# Altium PCB DB.PcbDoc (part 1 of 2)
Units mil, origin at the board's own origin, x right, y up, seen from the top; angles counter-clockwise.
Board outline 2968 x 1917 mil, 2 copper layers (Top Layer, Bottom Layer); 91 components, 77 nets, 333 pads, 79 vias.
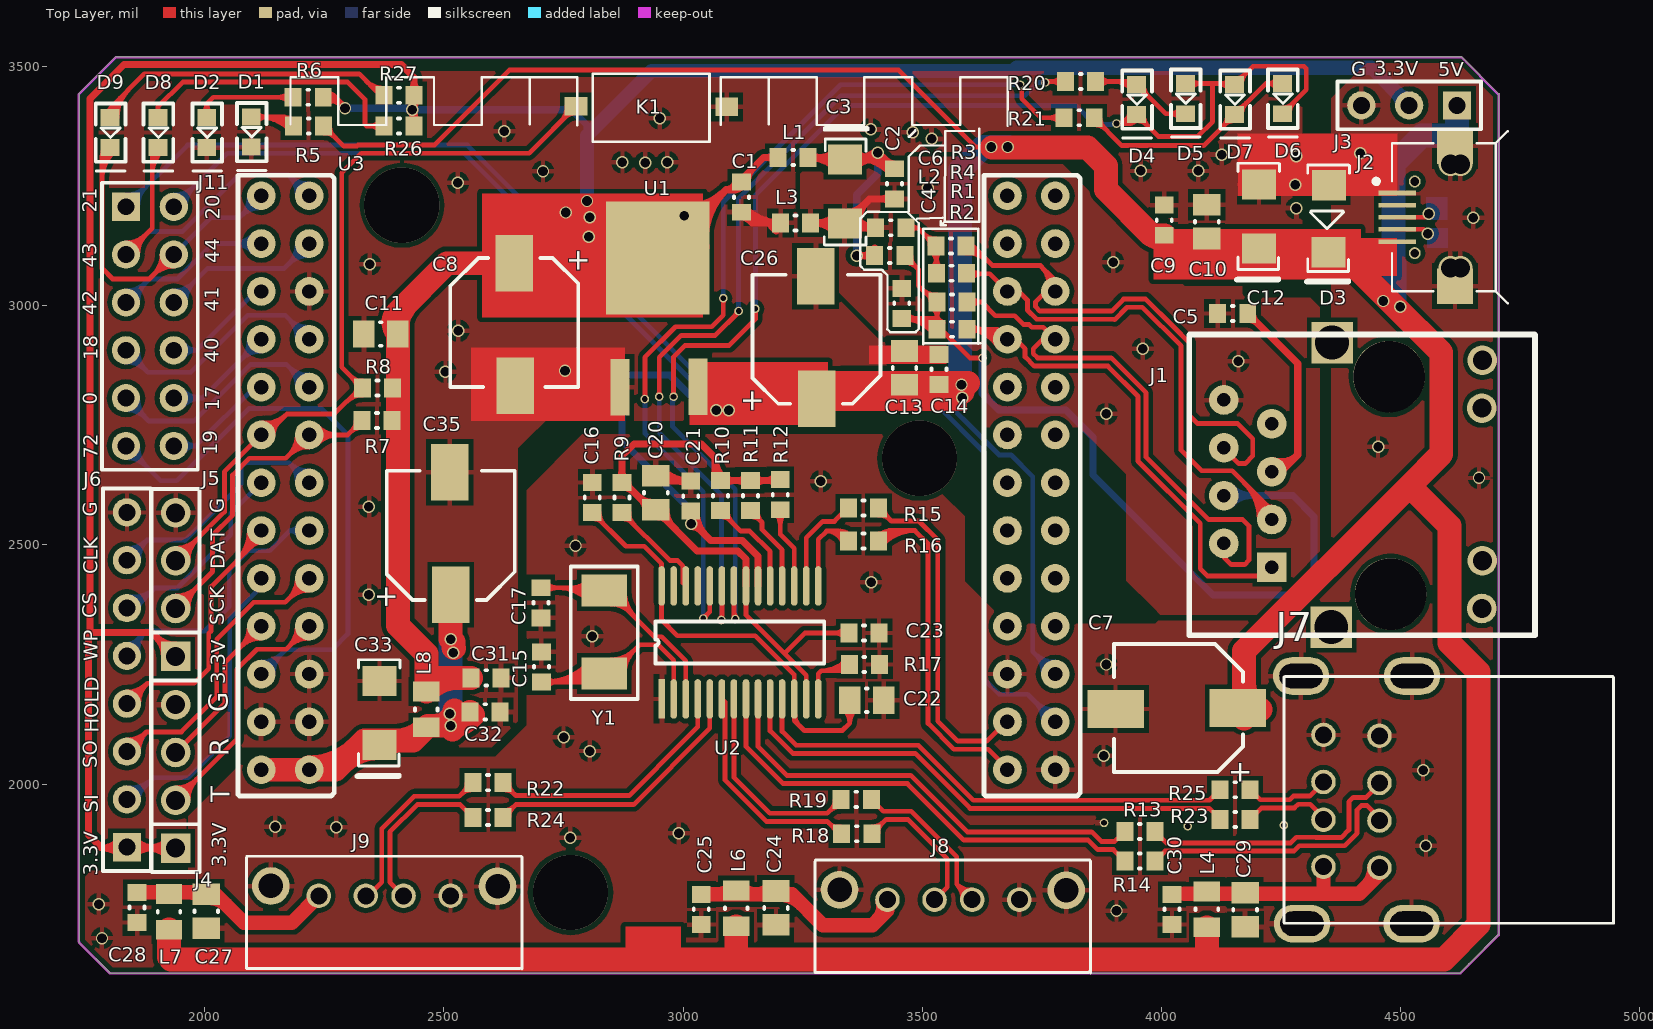
[diagram p0: Top Layer view]
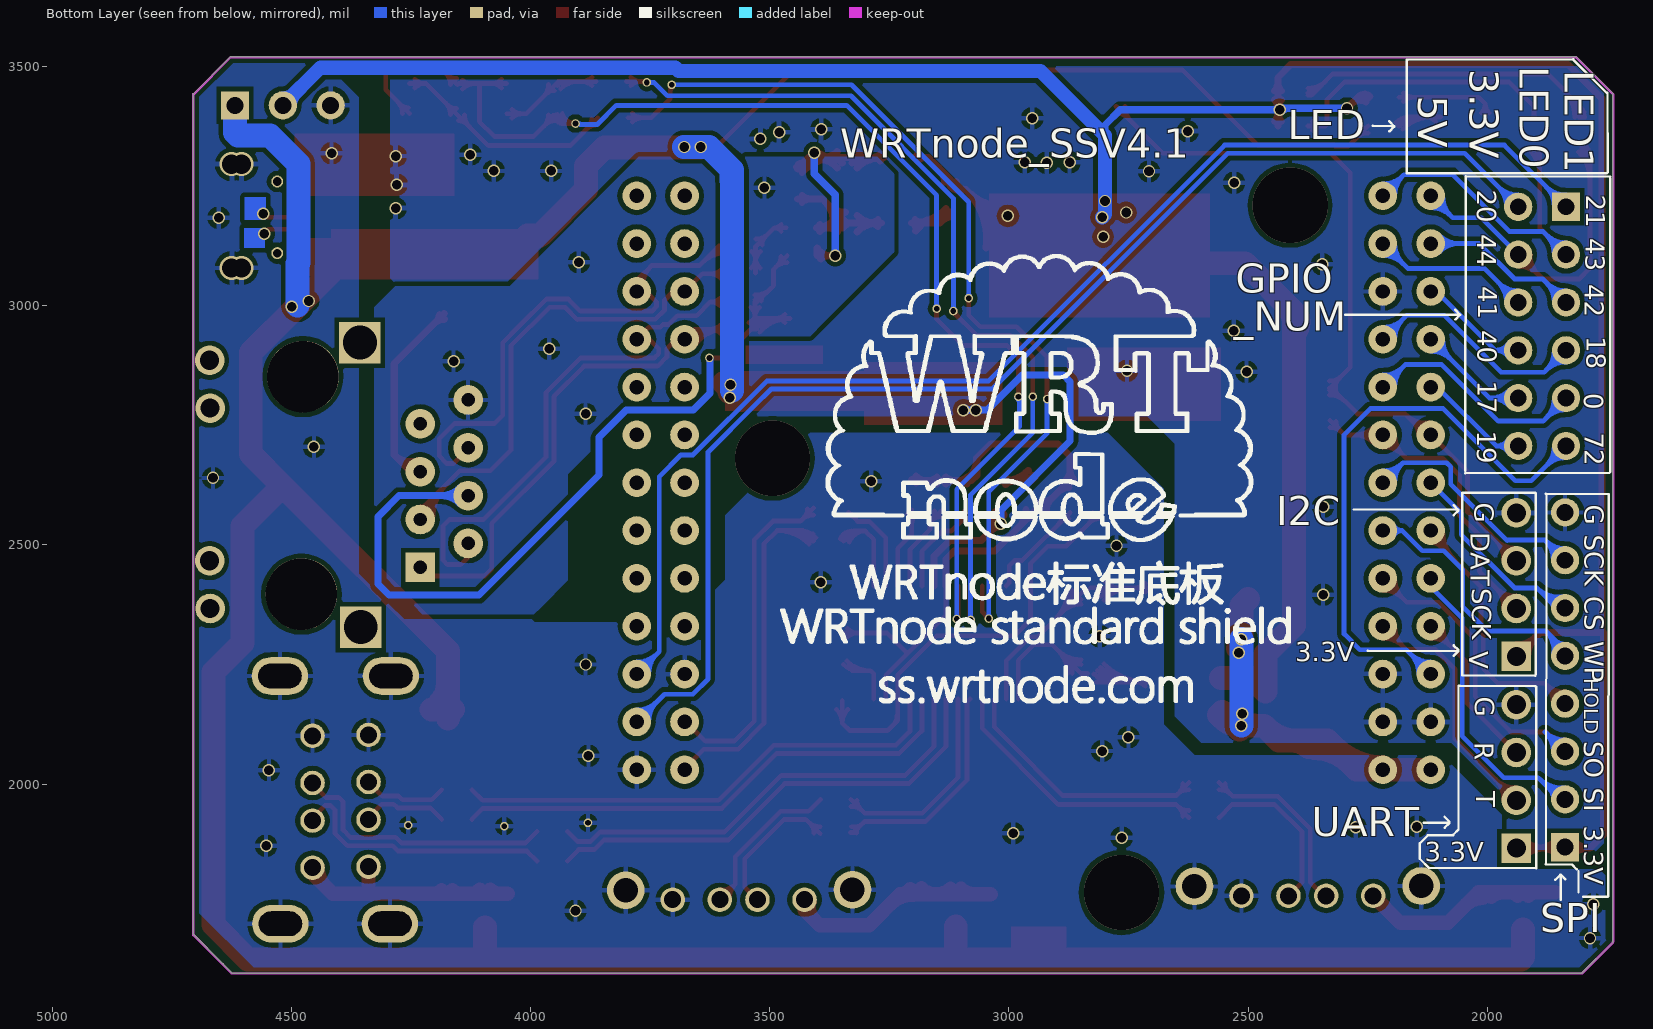
[diagram p1: Bottom Layer view, seen from below]

## Layer stack, top to bottom
Top Layer: signal copper 1.4
Dielectric: dielectric 12.6, FR-4, Dk 4.8
Bottom Layer: signal copper 1.4

## Board outline
1737,3444 1737,1669 1802,1604 4623,1604 4643,1624 4705,1686 4705,1688 4705,3443 4627,3521 1814,3521 1737,3444

## Design rules (kind name [scope] priority, off if disabled: settings)
Clearance [All] p1: gap=10
PolygonConnect [All] p1: connectstyle=Relief reliefconductorwidth=10 reliefentries=4 polygonreliefangle="90 Angle"
RoutingVias [All] p1: holewidth=20 width=30 viastyle="Through Hole" minholewidth=10 minwidth=10 maxholewidth=30 maxwidth=50
SilkToSilkClearance [All] p1: silktosilkclearance=0
SilkscreenOverComponentPads [All] p1: minsilkscreentomaskgap=0
SolderMaskExpansion [All] p1: expansion=4
Width [All] p1: maxlimit=100 minlimit=2 preferedwidth=10
26 further rules are at their usual default settings.

## Classes and differential pairs
component class "U_internet access": C1 C2 C3 C4 C5 C6 J1 L1 L2 L3 R1 R2 R3 R4
component class U_powre: C7 C8 C9 C10 C11 C34 D1 D2 D3 J2 J3 R5 R6 U1
component class U_spi_iic_uart: J4 J5 J6 R7 R8
component class "U_USB HUB": C12 C13 C14 C15 C16 C17 C18 C19 C20 C21 C22 C23 C24 C25 C26 C27 C28 C29 C30 D4 D5 D6 D7 J7 J8 J9 J10 L4 L5 L6 L7 R9 R10 R11 R12 R13 R14 R15 R16 R17 R18 R19 R20 R21 R22 R23 R24 R25 U2 Y1
component class U_WRTnode: C31 C32 C33 C34 C35 D8 D9 J11 K1 L8 R26 R27 U3

## Components (designator, comment, footprint, x,y, rotation, side; value= is the part's Value field where it differs from the comment)
C1 "C0603" C0603N 3118,3228 r270 top
C2 "C0603" C0603N 3438,3256 r270 top
C3 "C1206-A--AVX" C1206-A 3338,3274 r270 top
C4 "C0603" C0603N 3461,3004 r90 top
C5 "C0603" C0603N 4148,2980 r0 top
C6 "C0603" C0603N 3433,3159 r0 top
C7 "Cap Pol1" 16V220U 4042,2151 r270 top
C8 "Cap Pol1" 16V220U 2655,2971 r0 top
C9 "C0603N" C0603N 4002,3180 r270 top
C10 "C0805N" C0805N 4090,3174 r270 top
C11 "C0805" C0805N 2370,2936 r0 top
C12 "C1206-A--AVX" C1206-A 4204,3151 r90 top
C13 "C0805" C0805N 3458,2868 r270 top
C14 "C0603" C0603N 3531,2868 r270 top
C15 "C0603" C0603N 2708,2244 r90 top
C16 "C0603" C0603N 2806,2600 r270 top
C17 "C0603" C0603N 2699,2380 r270 top
C20 "C0805" C0805N 2938,2607 r270 top
C21 "C0603" C0603N 3012,2603 r270 top
C22 "C0805" C0805N 3386,2170 r0 top
C23 "C0603" C0603N 3377,2312 r0 top
C24 "C0805" C0805N 3199,1743 r90 top
C25 "C0603" C0603N 3042,1737 r90 top
C26 "Cap Pol1" 16V220U 3271,2924 r180 top
C27 "C0805" C0805N 2008,1736 r90 top
C28 "C0603" C0603N 1862,1741 r90 top
C29 "C0805" C0805N 4180,1739 r90 top
C30 "C0603" C0603N 4026,1737 r90 top
C31 "C0603N" C0603N 2587,2218 r0 top
C32 "C0603N" C0603N 2585,2147 r0 top
C33 "C1206-A--AVX" C1206-A 2365,2113 r90 top
C35 "Cap Pol1" 16V220U 2506,2514 r180 top
D1 "LED0603" LED0603 2098,3363 r270 top
D2 "LED0603" LED0603 2005,3362 r270 top
D3 "4733/05w" ZMM5V1 4345,3183 r90 top
D4 "LED0603" LED0603 3949,3431 r270 top
D5 "LED0603" LED0603 4051,3433 r270 top
D6 "LED0603" LED0603 4254,3433 r270 top
D7 "LED0603" LED0603 4154,3431 r270 top
D8 "LED1" LED0603 1903,3362 r270 top
D9 "LED1" LED0603 1803,3362 r270 top
J1 "RJ-45-RH911105A" RJ-45-HR911105A 4449,2630 r270 top
J2 "USB_MICRO" "MICRO USB2" 4697,3187 r0 top
J3 "Header 3" HDR1X3 4618,3419 r180 top
J4 "SIP4" SIP4-2.54 1941,1867 r90 top
J5 "SIP4" SIP4-2.54 1941,2268 r90 top
J6 "Header 8" HDR1X8 1837,1868 r90 top
J7 "USB-DOUBLE" PCBCOMPONENT_1 4388,1973 r0 top
J8 "USB_SOCKET" USB-A-90-L 3477,1632 r0 top
J9 "USB_SOCKET" USB-A-90-L 2288,1640 r0 top
J11 "Header 6X2" HDR2X6 1835,3207 r270 top
K1 "Header 2" 3*6key 2940,3420 r180 top
L1 "L0603" C0603N 3229,3306 r0 top
L2 "L0603" C0603N 3433,3109 r180 top
L3 "L0603" C0603N 3234,3169 r0 top
L4 "R0805N" R0805N 4091,1742 r90 top
L6 "R0805N" R0805N 3107,1744 r90 top
L7 "R0805N" R0805N 1921,1737 r90 top
L8 "R0805N" R0805N 2467,2152 r270 top
R1 "R0603" R0603N 3561,3005 r180 top
R2 "R0603" R0603N 3561,2948 r180 top
R3 "R0603" R0603N 3561,3128 r0 top
R4 "R0603" R0603N 3562,3071 r0 top
R5 "R0603" R0603N 2216,3373 r180 top
R6 "R0603" R0603N 2215,3433 r180 top
R7 "R0603" R0603N 2361,2763 r0 top
R8 "R0603" R0603N 2360,2825 r180 top
R9 "R0603" R0603N 2869,2600 r90 top
R10 "Res Semi" R0603N 3075,2604 r90 top
R11 "Res Semi" R0603N 3138,2604 r90 top
R12 "Res Semi" R0603N 3200,2606 r90 top
R13 "Res Semi" R0603N 3956,1904 r0 top
R14 "Res Semi" R0603N 3956,1842 r0 top
R15 "R0603" R0603N 3378,2580 r0 top
R16 "R0603" R0603N 3378,2511 r0 top
R17 "R0603" R0603N 3378,2247 r180 top
R18 "Res Semi" R0603N 3364,1899 r0 top
R19 "Res Semi" R0603N 3363,1971 r0 top
R20 "R0603" R0603N 3830,3466 r180 top
R21 "R0603" R0603N 3827,3390 r180 top
R22 "Res Semi" R0603N 2591,2000 r180 top
R23 "R0603N" R0603N 4155,1929 r0 top
R24 "Res Semi" R0603N 2591,1927 r180 top
R25 "R0603N" R0603N 4155,1991 r0 top
R26 "R0603" R0603N 2405,3373 r180 top
R27 "R0603" R0603N 2405,3437 r180 top
U1 "LD1117-3.3" LD1117-3.3V 2951,2963 r0 top
U2 "FE1.1S" SSOP28 2955,2178 r90 top
U3 "WRTnode_MainBoard" WRTNODE_MAINBOARD_DIP26*2 3778,3230 r0 top locked
Y1 "12MHz" XTAL_5032_2 2835,2318 r270 top
? "Comment" LOGO 2938,2649.43 r180 bottom

## Footprints (in the part's own frame and the unit in brackets; to place one, negate y for a bottom-side part, rotate by r counter-clockwise, add the part's x,y. Pads: shape width x height; smd on the part's side, far side on the other; paste and mask are expansions set on the pad)
3*6key [mil]
  rect 47.24x39.37 smd: 1(-151,4) 2(164,3)
  silkscreen extent -115,-65 129,77, body extent -113,-50 128,66, height 50
16V220U [mil]
  rect 78.74x118.11 smd: 1(-8,118) 2(-6,-138)
  silkscreen extent -142,-141 126,129, body extent -125,-133 114,107, height 150
C0603N [mm]
  rect 0.9x1 smd: 1(-0.775,0.102) 2(0.825,0.102)
  silkscreen extent -0.02,-0.3 0.08,0.5, body extent -0.85,-0.37 0.9,0.58, height 0.55
C0805N [mm]
  rect 1.15x1.45 smd: 1(-0.951,0.127) 2(0.849,0.127)
  silkscreen extent -0.1,-0.5 0,0.75, body extent -1.15,-0.6 1.05,0.85, height 0.75
C1206-A [mm]
  rect 1.6x1.8 smd: 1(-0.8,0) 2(2.6,0)
  silkscreen extent -2.51,-1.09 3.73,1.24, body extent -1.22,-0.89 2.98,0.91, height 0.75
HDR1X3 [mm] "Connector; Header; 3 Position"
  rect 1.5x1.5 hole 0.9: 1(0,0)
  round 1.5 hole 0.9: 2(2.54,0) 3(5.08,0)
  silkscreen extent -1.27,-1.27 6.35,1.27
HDR1X8 [mm] "Connector; Header; 8 Position"
  rect 1.5x1.5 hole 0.9: 1(0,0)
  round 1.5 hole 0.9: 2(2.54,0) 3(5.08,0) 4(7.62,0) 5(10.16,0) 6(12.7,0) 7(15.24,0) 8(17.78,0)
  silkscreen extent -1.27,-1.27 19.05,1.27
HDR2X6 [mm] "Connector; Header; 6x2 Position"
  rect 1.5x1.5 hole 0.9: 1(0,0)
  round 1.5 hole 0.9: 2(0,2.54) 3(2.54,0) 4(2.54,2.54) 5(5.08,0) 6(5.08,2.54) 7(7.62,0) 8(7.62,2.54) 9(10.16,0) 10(10.16,2.54) 11(12.7,0) 12(12.7,2.54)
  silkscreen extent -1.27,-1.27 13.97,3.81
LD1117-3.3V [mil]
  rect 39.37x118.11 smd: 1(80,-132) 2(-83,-133)
  rect 216.54x236.22 smd: 3(-4,137)
  body extent -115,-79 110,222, height 94
LED0603 [mm]
  rect 0.9x1 smd: 1(-0.8,-0.025) 2(0.8,-0.025)
  silkscreen extent -1.55,-0.79 2.03,0.79, body extent -0.87,-0.5 0.88,0.45, height 1.1
LOGO [mil]
  silkscreen extent -537,-478 525,456
"MICRO USB2" [mil]
  rect 78.74x9.84 smd: 1(-204,49) 2(-204,23) 3(-204,-2) 4(-204,-27) 5(-204,-53)
  round 25 hole 18 unplated: MH1(-167.4,72.83) MH2(-167.4,-76.77)
  rect 74.8x74.8 smd: ""(-83,-146) ""(-83,147)
  silkscreen extent -253,-182 27,178, body extent -204,-163 29,159, height 105
PCBCOMPONENT_1 [mm]
  round 1.3 hole 0.9: 1(-1.25,3.297) 2(-1.25,0.797) 3(-1.25,-1.203) 4(-1.25,-3.703) 5(1.722,-3.754) 6(1.722,-1.254) 7(1.722,0.746) 8(1.722,3.246)
  oval 3x2 hole 1.3 slot 2.3 at 0 deg: 9(-2.388,-6.731) 10(3.429,-6.731) 11(3.454,6.426) 12(-2.438,6.426)
  silkscreen extent -3.35,-6.71 14.15,6.4, body extent -3.4,-6.81 14.15,6.43, height 15.6
R0603N [mm]
  rect 0.9x1 smd: 1(-0.825,-0.076) 2(0.775,-0.076)
  silkscreen extent -0.08,-0.48 0.02,0.32, body extent -0.87,-0.55 0.82,0.4, height 0.6
R0805N [mm]
  rect 1.05x1.4 smd: 1(-1.052,-0.102) 2(0.848,-0.102)
  silkscreen extent -0.15,-0.7 -0.05,0.5, body extent -1.2,-0.78 1,0.57, height 0.7
RJ-45-HR911105A [mil]
  rect 86.61x86.61 hole 70.87: 0(-293,-92) 0(302,-94)
  round 149.61 hole 149.61: 0(-222,27) 0(233,30)
  rect 62x62 hole 28: 1(176.89,-218.37)
  round 62 hole 28: 2(126.89,-318.37) 3(76.89,-218.37) 4(26.89,-318.37) 5(-23.11,-218.37) 6(-73.11,-318.37) 7(-123.11,-218.37) 8(-173.11,-318.37)
  round 62 hole 40: 9(263,221) 10(163,222) 11(-156,221) 12(-256,222)
  silkscreen extent -310,-391 319,332, body extent -302,-387 304,349, height 550
SIP4-2.54 [mil]
  rect 62x62 hole 40: 1(-1,2)
  round 62 hole 40: 2(99,2) 3(199,2) 4(299,2)
  silkscreen extent -51,-48 349,52, body extent -70,-44 330,56, height 131
SSOP28 [mm]
  rect 2.1x0.35 smd: 1(0,0)
  oval 2.1x0.35 smd: 2(0,-0.64) 3(0,-1.28) 4(0,-1.92) 5(0,-2.56) 6(0,-3.2) 7(0,-3.84) 8(0,-4.48) 9(0,-5.12) 10(0,-5.76) 11(0,-6.4) 12(0,-7.04) 13(0,-7.68) 14(0,-8.32) 15(6,-8.32) 16(6,-7.68) 17(6,-7.04) 18(6,-6.4) 19(6,-5.76) 20(6,-5.12) 21(6,-4.48) 22(6,-3.84) 23(6,-3.2) 24(6,-2.56) 25(6,-1.92) 26(6,-1.28) 27(6,-0.64) 28(6,0)
  silkscreen extent 1.89,-8.64 4.12,0.32, body extent 0.89,-8.76 5.08,0.38, height 0.76
USB-A-90-L [mm]
  round 1.3 hole 0.9: 1(-1.265,3.206) 2(1.235,3.206) 3(3.235,3.206) 4(5.735,3.206)
  round 2 hole 1.3: 5(-3.81,3.734) 6(8.23,3.708)
  silkscreen extent -5.11,-0.69 9.53,5.31, body extent -5.32,-1.19 9.74,5.81, height 14.5
WRTNODE_MAINBOARD_DIP26*2 [mil]
  round 60 hole 30: 1(0,0) 2(0,-100) 3(0,-200) 4(0,-300) 5(0,-400) 6(0,-500) 7(0,-600) 8(0,-700) 9(0,-800) 10(0,-900) 11(0,-1000) 12(0,-1100) 13(0,-1200) 14(-100,0) 15(-100,-100) 16(-100,-200) 17(-100,-300) 18(-100,-400) 19(-100,-500) 20(-100,-600) 21(-100,-700) 22(-100,-800) 23(-100,-900) 24(-100,-1000) 25(-100,-1100) 26(-100,-1200) 27(-1560,0) 28(-1560,-100) 29(-1560,-200) 30(-1560,-300) 31(-1560,-400) 32(-1560,-500) 33(-1560,-600) 34(-1560,-700) 35(-1560,-800) 36(-1560,-900) 37(-1560,-1000) 38(-1560,-1100) 39(-1560,-1200) 40(-1660,0) 41(-1660,-100) 42(-1660,-200) 43(-1660,-300) 44(-1660,-400) 45(-1660,-500) 46(-1660,-600) 47(-1660,-700) 48(-1660,-800) 49(-1660,-900) 50(-1660,-1000) 51(-1660,-1100) 52(-1660,-1200)
  silkscreen extent -1709,-1255 52,248, body extent -1712,-1263 47,50, height 335
XTAL_5032_2 [mm]
  rect 1.7x2.4 smd: 1(-2.2,0) 2(2.2,0)
  silkscreen extent -3.48,-1.78 3.56,1.78, body extent -2.5,-1.48 2.5,1.52, height 1.5
ZMM5V1 [mil]
  rect 62.99x70.87 smd: 1(69,-5) 2(-71,-4)
  silkscreen extent -135,-48 111,44, body extent -84,-40 81,31, height 30

## Part data
C1 C2 C4 C5 C6 C9 C10 C11 C13 C14 C15 C16 C17 C20 C21 C22 C23 C24 C25 C27 C28 C29 C30: library part "Cap Semi", "Capacitor (Semiconductor SIM Model)"
C3 C12 C33: library part "Cap Pol3", "Polarized Capacitor (Surface Mount)"
C7 C8 C26 C35: "Polarized Capacitor (Radial)"
C31 C32: library part Cap, "Capacitor"
D1 D2 D4 D5 D6 D7: library part LED, "LED"
D3: library part Diode, "Default Diode"
D8 D9: "Typical RED GaAs LED"
J2: library part USB_powre
J3: "Header, 3-Pin"
J4 J5: "jointbar"
J6: "Header, 8-Pin"
J8 J9: "USB_TYPEA_SOCKET"
J11: "Header, 6-Pin, Dual row"
K1: "Header, 2-Pin"
L1 L2 L3 L4 L6 L7 L8: library part Inductor, "Inductor"
R1 R2 R3 R4 R5 R6 R7 R8 R9 R15 R16 R17 R20 R21 R23 R25 R26 R27: library part "Res Semi", "Semiconductor Resistor"
R10 R11 R12 R13 R14 R18 R19 R22 R24: "Semiconductor Resistor"
Y1: library part XTAL, "Crystal Oscillator"

## Free pads (board coordinates)
  round 18 hole 12: 0(3626,2891) 1(3042,2346) 2(3080,2343) 2(3880,1919) 3(3109,2345) 3(4055,1912) 4(2920,2805) 5(2950,2810) 6(2980,2810) 7(3084,3016) 8(3116,2989) 9(3151,2994) 10(3757,3467) 11(3705,3462) 12(3906,3381) 14(4256,1914)

## Via types
v1: diameter 26, hole 20, Top Layer to Bottom Layer, tented both sides, 72 vias
v2: diameter 50, hole 40, Top Layer to Bottom Layer, 4 vias
v3: diameter 157.48, hole 157.48, Top Layer to Bottom Layer, 3 vias

## Nets (pads, with @x,y where several pads share a name; then routed paths per layer and width w, separated by ;. In a path a pad name is that pad's centre, name@x,y a point inside that pad or via, vN(x,y) a via of type N, cw(c..) or ccw(c..) an arc to the next point about the centre after c; other vN are vias at no path point)
ANT_TRN: J11.12 U3.44 | length 294.4
  Bottom Layer w10: J11.12@1935,2707 1981,2707 ; J11.12@1955.37,2693.33 cw(c1981,2676.13) 1981,2707 ; J11.12@1955.37,2720.67 ccw(c1981,2737.87) 1981,2707 ; U3.44@2118,2830 2104,2830 1981,2707
ANT_TRNB: J11.7 U3.30 | length 771.9
  Bottom Layer w10: J11.7@1835,2882.47 cw(c1835,2823.26) 1876.87,2865.13 cw(c1918.74,2907) J11.7@1859.53,2907 ; J11.7@1835,2892.47 cw(c1835,2857.4) 1859.8,2882.2 cw(c1884.6,2907) J11.7@1849.53,2907 ; J11.7@1835,2907 1881,2861 1971,2861 2090,2980 2168,2980 U3.30@2218,2930 ; U3.30@2193,2930 ccw(c2132.64,2930) 2175.32,2972.68 ccw(c2218,3015.36) U3.30@2218,2955 ; U3.30@2203,2930 ccw(c2166.79,2930) 2192.39,2955.61 ccw(c2218,2981.21) U3.30@2218,2945
AVCC3V3: C2.1 C3.1 L1.2 L2.2 | length 1082.2
  Top Layer w15: L1.2@3261.5,3310 3418.5,3310 C2.1@3442,3286.5 ; L1.2@3265.26,3310 cw(c3265.26,3236.69) C3.1@3317.1,3288.53 ; L1.2@3268.72,3302.78 cw(c3286.16,3285.34) 3286.16,3310 cw(c3286.16,3334.66) L1.2@3268.72,3317.22 ; 3287.01,3310 ccw(c3287.01,3352.55) C3.1@3317.1,3322.46 ; 3301.47,3310 cw(c3301.47,3272.9) C3.1@3327.7,3299.13 ; C3.1@3348.3,3299.13 cw(c3374.53,3272.9) 3374.53,3310 ; C3.1@3358.62,3310 cw(c3358.62,3205.09) C2.1@3432.81,3279.27 ; C3.1@3358.9,3288.53 cw(c3410.74,3236.69) v1@3410.74,3310 ; C3.1@3358.9,3322.46 ccw(c3388.99,3352.55) 3388.99,3310 ; v1(3363,3105) L2.2@3400.5,3105 L2.2@3400.5,3120.32 ; v1@3366.89,3101.11 cw(c3376.28,3091.72) 3376.28,3105 cw(c3376.28,3118.28) v1@3366.89,3108.89 ; C3.1@3369.58,3310 ccw(c3369.58,3357.42) v1@3403.11,3323.89 ; L2.2@3393.28,3097.78 ccw(c3375.84,3080.34) 3375.84,3105 ccw(c3375.84,3129.66) L2.2@3393.28,3112.22 ; 3394.84,3310 cw(c3394.84,3241.3) C2.1@3443.41,3289.88 ; v1@3407,3314.5 cw(c3407,3297.61) 3418.94,3309.55 ; 3421.2,3307.3 cw(c3400.4,3286.5) C2.1@3429.82,3286.5 ; C2.1@3425.95,3302.54 ccw(c3440.03,3316.62) C2.1@3440.03,3296.71
  Bottom Layer w15: v1@3359.11,3108.89 ccw(c3349.72,3118.28) 3363,3118.28 ccw(c3376.28,3118.28) v1@3366.89,3108.89 ; v1(3363,3105) 3363,3232 3407,3276 v1(3407,3320) ; v1@3403.11,3316.11 cw(c3393.72,3306.72) 3407,3306.72 cw(c3420.28,3306.72) v1@3410.89,3316.11
DRV: D4.2 D5.1 D6.2 D7.1 pad.3@3109,2345 pad.6 pad.9 pad.12 U2.22 | length 3173
  Top Layer w10: pad.6@2977.17,2812.83 ccw(c2970.34,2819.66) 2980,2819.66 ccw(c2989.66,2819.66) pad.6@2982.83,2812.83 ; pad.6@2980,2810 2980,2893 3004,2917 3096,2917 3151,2972 pad.9@3151,2994 ; 3106.18,2361.46 ccw(c3125.46,2361.46) pad.3@3111.83,2347.83 ; U2.22@3106.18,2414.22 3106.18,2347.82 pad.3@3109,2345 ; pad.9@3148.17,2991.17 cw(c3141.34,2984.34) 3151,2984.34 cw(c3160.66,2984.34) pad.9@3153.83,2991.17 ; pad.12@3908.83,3378.17 cw(c3915.66,3371.34) 3915.66,3381 cw(c3915.66,3390.66) pad.12@3908.83,3383.83 ; 3918.82,3381 ccw(c3918.82,3406.34) D4.2@3943.4,3400.17 ; 3931.64,3381 ccw(c3931.64,3403.12) D4.2@3953.1,3397.73 ; D4.2@3933.7,3402.6 cw(c3906,3409.56) pad.12@3906,3381 3929.5,3381 D4.2@3948,3399.5 3993.5,3354 4076,3354 4107,3385 4107,3463.5 4108,3464.5 ; D4.2@3933.88,3395.74 cw(c3920.78,3391.68) 3930.48,3381.98 cw(c3942.56,3369.9) D4.2@3944.55,3386.87 ; D4.2@3949.97,3386.79 cw(c3949.97,3360.84) 3968.32,3379.19 ; D4.2@3962.69,3399.5 ccw(c3998.14,3399.5) 3973.07,3374.44 ; D5.1@4050,3464.5 4108,3464.5 ; D5.1@4060.96,3455.5 cw(c4082.67,3433.8) 4082.67,3464.5 cw(c4082.67,3495.2) D5.1@4060.96,3473.49 ; 4115.5,3464.5 cw(c4115.5,3426.97) D7.1@4142.04,3453.5 ; 4125.16,3464.5 ccw(c4125.16,3488.37) D7.1@4142.04,3471.49 ; D7.1@4154.97,3475.21 ccw(c4154.97,3501.16) 4173.32,3482.81 ; D7.1@4167.69,3462.5 cw(c4203.14,3462.5) 4178.07,3487.56 ; D6.2@4253,3401.5 4303,3451.5 4303,3496 4298,3501 4191.5,3501 D7.1@4153,3462.5 4151,3464.5 4108,3464.5 ; D6.2@4254.97,3414.22 ccw(c4254.97,3440.17) 4273.32,3421.82 ; D6.2@4267.69,3401.5 cw(c4303.14,3401.5) 4278.07,3426.57
  Bottom Layer w10: 2978,2795.51 cw(c2994.49,2795.51) pad.6@2982.83,2807.17 ; pad.6@2980,2810 2978,2808 2978,2747 3109,2616 pad.3@3109,2345 ; pad.3@3106.17,2347.83 ccw(c3099.34,2354.66) 3109,2354.66 ccw(c3118.66,2354.66) pad.3@3111.83,2347.83 ; pad.9@3148.17,2996.83 ccw(c3141.34,3003.66) 3151,3003.66 ccw(c3160.66,3003.66) pad.9@3153.83,2996.83 ; pad.9@3151,2994 3151,3231 3339,3419 3821,3419 3861,3379 3897,3379 ; 3891.51,3379 ccw(c3891.51,3395.49) pad.12@3903.17,3383.83
GND: C1.2 C7.2 C8.2 C9.1 C10.1 C11.1 C12.2 C13.1 C14.1 C15.2 C16.1 C17.2 C20.1 C21.1 C22.2 C23.2 C24.1 C25.1 C26.2 C27.1 C28.1 C29.1 C30.1 C31.2 C32.2 C33.2 C35.2 D1.2 D2.2 D3.1 J2. J2.1 J3.3 J4.4 J5.4 J6.8 J7.1 J7.8 J7.9 J7.10 J7.11 J7.12 J8.4 J8.5 J8.6 J9.4 J9.5 J9.6 K1.1 L3.1 pad.2@3880,1919 pad.3@4055,1912 pad.14 R17.1 U1.2 U2.1 U3.13 U3.24 U3.29 U3.37 U3.38 U3.51 | length 535
  Top Layer w15: C20.1@2943,2644.43 2953.94,2633.5 C21.1@3016,2633.5 ; C20.1@2949,2644.53 ccw(c2975.64,2671.17) 2975.64,2633.5 ; C20.1@2959.61,2655.14 ccw(c3011.86,2707.38) C21.1@3011.86,2633.5 ; C21.1@3006.81,2626.27 ccw(c2989.37,2608.83) 2989.37,2633.5 ccw(c2989.37,2658.16) C21.1@3006.81,2640.72 ; C1.2@3120.59,3192.12 ccw(c3166.75,3238.28) 3166.75,3173 ; C1.2@3122,3195.5 3144.5,3173 L3.1@3203.5,3173 ; C1.2@3123.97,3185.29 cw(c3123.97,3165.38) C1.2@3138.05,3179.46 ; C1.2@3131.19,3202.73 ccw(c3202.96,3274.5) L3.1@3202.96,3173 ; C1.2@3134.18,3195.5 ccw(c3163.6,3195.5) 3142.8,3174.7 ; 3172,3179.5 L3.1@3194.5,3157 ; L3.1@3196.28,3165.78 ccw(c3178.84,3148.34) 3178.84,3173 ccw(c3178.84,3197.66) L3.1@3196.28,3180.22
  other v1: 1785,1678 3906,1735 1778,1749 4553,1871 2764,1888 2991,1897 2275,1910 2147,1911 4547,2029 3879,2059 2805,2069 2750,2098 3885,2250 2810,2309 2343,2396 3393,2422 2775,2498 2343,2580 3288,2633 4664,2640 4453,2705 2503,2862 2753,2864 2530,2948 2345,3087 4652,3184 4282,3204 4280,3253 2529,3257 2707,3281 3957,3282 4077,3282 2921,3299 2873,3300 2967,3300 4282,3313 4126,3316 4416,3319 3520,3349 3480,3363 2626,3365 3392,3369 2951,3392
  other v2: 4604,3079 4625,3079 4604,3296 4625,3296
GND1: C2.2 C3.2 C4.2 C5.1 C6.1 J1.8 L3.2 | length 664
  Top Layer w15: L3.2@3266.5,3173 3336.64,3173 C3.2@3338,3171.64 ; L3.2@3272.84,3173 cw(c3272.84,3110.42) C3.2@3317.1,3154.67 ; L3.2@3273.72,3165.78 cw(c3291.16,3148.34) 3291.16,3173 cw(c3291.16,3197.66) L3.2@3273.72,3180.22 ; L3.2@3279.42,3173 ccw(c3279.42,3226.28) C3.2@3317.1,3188.61 ; C3.2@3341.94,3195.63 ccw(c3341.94,3244.06) 3376.18,3209.82 ; C3.2@3349.45,3176.59 ccw(c3374.66,3193.19) 3374.66,3163 ; C3.2@3358.9,3154.67 cw(c3379.01,3134.56) 3379.01,3163 ; C3.2@3361.98,3184.84 ccw(c3402.5,3211.52) C6.1@3402.5,3163 3346.64,3163 C3.2@3338,3171.64 ; C3.2@3365.93,3171.64 cw(c3433.37,3171.64) 3385.68,3219.32 ; C6.1@3395.28,3155.78 ccw(c3377.84,3138.34) 3377.84,3163 ccw(c3377.84,3187.66) C6.1@3395.28,3170.22 ; C2.2@3432.81,3216.28 ccw(c3415.37,3198.84) 3415.37,3223.5 ccw(c3415.37,3248.17) C2.2@3432.81,3230.73 ; C2.2@3442,3223.5 3389.87,3223.5 C3.2@3338,3171.64
  other v1: 3885,2774 4161,2884 3961,2910 3899,3091 3511,3247
GPO0: J11.9 U3.31 | length 771
  Bottom Layer w10: J11.9@1835,2782.47 cw(c1835,2723.26) 1876.87,2765.13 cw(c1918.74,2807) J11.9@1859.53,2807 ; J11.9@1835,2792.47 cw(c1835,2757.4) 1859.8,2782.2 cw(c1884.6,2807) J11.9@1849.53,2807 ; J11.9@1835,2807 1883,2759 1977,2759 2095,2877 2171,2877 U3.31@2218,2830 ; U3.31@2193,2830 ccw(c2132.64,2830) 2175.32,2872.68 ccw(c2218,2915.36) U3.31@2218,2855 ; U3.31@2203,2830 ccw(c2166.79,2830) 2192.39,2855.61 ccw(c2218,2881.21) U3.31@2218,2845
LED1: pad.2@3080,2343 pad.5 pad.8 pad.10 R20.2 U2.23 | length 2066.8
  Top Layer w10: pad.5@2947.17,2812.83 ccw(c2940.34,2819.66) 2950,2819.66 ccw(c2959.66,2819.66) pad.5@2952.83,2812.83 ; pad.5@2950,2810 2950,2892 2996,2938 3067,2938 3116,2987 pad.8@3116,2989 ; pad.2@3077.17,2345.83 ccw(c3067.97,2355.03) 3080.98,2355.03 ; pad.2@3080,2343 3080,2351 3080.98,2351.98 U2.23@3080.98,2414.22 ; 3107.76,2978.76 ccw(c3097.51,2989) pad.8@3112,2989 ; pad.10@3757,3467 3759,3469 R20.2@3799.5,3469 ; pad.10@3759.83,3464.17 cw(c3771.49,3452.51) 3771.49,3469 ; R20.2@3790.51,3460.01 ccw(c3768.8,3438.3) 3768.8,3469 ccw(c3768.8,3499.7) R20.2@3790.51,3477.99
  Bottom Layer w10: pad.5@2947.17,2807.17 cw(c2940.34,2800.34) 2950,2800.34 cw(c2959.66,2800.34) pad.5@2952.83,2807.17 ; pad.5@2950,2810 2950,2735 3080,2605 pad.2@3080,2343 ; pad.2@3077.17,2345.83 ccw(c3070.34,2352.66) 3080,2352.66 ccw(c3089.66,2352.66) pad.2@3082.83,2345.83 ; pad.8@3113.17,2991.83 ccw(c3106.34,2998.66) 3116,2998.66 ccw(c3125.66,2998.66) pad.8@3118.83,2991.83 ; pad.8@3116,2989 3116,3224.96 3330.04,3439 3465,3439 ; 3486,3439 3465,3439 ; pad.10@3757,3467 3742,3467 3714,3439 3465,3439
LED2: pad.1 pad.4 pad.7 pad.11 R21.2 U2.24 | length 2119.3
  Top Layer w10: pad.4@2917.17,2807.83 ccw(c2910.34,2814.66) 2920,2814.66 ccw(c2929.66,2814.66) pad.4@2922.83,2807.83 ; pad.4@2920,2805 2920,2892 2984,2956 3060,2956 3084,2980 pad.7@3084,3016 ; pad.1@3042,2346 3055.79,2359.79 U2.24@3055.79,2414.22 ; pad.1@3042,2350 ccw(c3042,2359.66) 3048.83,2352.83 ccw(c3055.66,2346) pad.1@3046,2346 ; pad.7@3081.17,3013.17 cw(c3074.34,3006.34) 3084,3006.34 cw(c3093.66,3006.34) pad.7@3086.83,3013.17 ; pad.11@3702.17,3459.17 cw(c3688.1,3445.1) 3708,3445.1 ; pad.11@3708,3462 3708,3433 3748,3393 R21.2@3796.5,3393 ; R21.2@3787.51,3384.01 ccw(c3765.8,3362.3) 3765.8,3393 ccw(c3765.8,3423.7) R21.2@3787.51,3401.99
  Bottom Layer w10: pad.4@2917.17,2802.17 cw(c2910.34,2795.34) 2920,2795.34 cw(c2929.66,2795.34) pad.4@2922.83,2802.17 ; pad.4@2920,2805 2920,2733 2933,2720 3042,2611 pad.1@3042,2346 ; pad.1@3039.17,2348.83 ccw(c3032.34,2355.66) 3042,2355.66 ccw(c3051.66,2355.66) pad.1@3044.83,2348.83 ; pad.7@3081.17,3018.83 ccw(c3074.34,3025.66) 3084,3025.66 ccw(c3093.66,3025.66) pad.7@3086.83,3018.83 ; pad.7@3084,3016 3084,3217 3329,3462 pad.11@3705,3462
LINK0: J11.8 U3.42 | length 299.5
  Bottom Layer w10: J11.8@1935,2907 1983,2907 ; J11.8@1954.88,2892.63 cw(c1983,2872.3) 1983,2907 ; J11.8@1954.88,2921.37 ccw(c1983,2941.7) 1983,2907 ; U3.42@2118,3030 2106,3030 1983,2907
LINK1: J11.6 U3.28 | length 633.7
  Bottom Layer w10: J11.6@1935,3007 2006,3078 2166,3078 U3.28@2218,3130 ; J11.6@1935,3021.53 ccw(c1935,3056.6) 1959.8,3031.8 ccw(c1984.6,3007) J11.6@1949.53,3007 ; J11.6@1935,3031.53 ccw(c1935,3090.74) 1976.87,3048.87 ccw(c2018.74,3007) J11.6@1959.53,3007 ; U3.28@2193,3130 cw(c2132.64,3130) 2175.32,3087.32 cw(c2218,3044.64) U3.28@2218,3105 ; U3.28@2203,3130 cw(c2166.79,3130) 2192.39,3104.39 cw(c2218,3078.79) U3.28@2218,3115
LINK2: J11.5 U3.41 | length 633.7
  Bottom Layer w10: J11.5@1835,3007 1884,3056 1942.73,3056 2016.73,3130 U3.41@2118,3130 ; J11.5@1835,3021.53 ccw(c1835,3056.6) 1859.8,3031.8 ccw(c1884.6,3007) J11.5@1849.53,3007 ; J11.5@1835,3031.53 ccw(c1835,3090.74) 1876.87,3048.87 ccw(c1918.74,3007) J11.5@1859.53,3007 ; U3.41@2100.32,3112.32 ccw(c2057.64,3069.64) 2057.64,3130 ccw(c2057.64,3190.36) U3.41@2100.32,3147.68 ; U3.41@2107.39,3119.39 ccw(c2081.79,3093.79) 2081.79,3130 ccw(c2081.79,3166.21) U3.41@2107.39,3140.61
LINK3: D8.2 J11.3 U3.27 | length 1252.6
  Top Layer w10: J11.3@1835,3107 1890,3162 1890,3318.5 D8.2@1902,3330.5 ; J11.3@1835,3121.53 ccw(c1835,3156.6) 1859.8,3131.8 ccw(c1884.6,3107) J11.3@1849.53,3107 ; J11.3@1835,3131.53 ccw(c1835,3190.74) 1876.87,3148.87 ccw(c1918.74,3107) J11.3@1859.53,3107 ; 1890,3275.59 cw(c1954.95,3275.59) D8.2@1909.02,3321.51 ; 1890,3299.73 cw(c1930.81,3299.73) D8.2@1901.95,3328.58
  Bottom Layer w10: J11.3@1835,3107 1883,3155 1953,3155 2072,3274 2174,3274 U3.27@2218,3230 ; J11.3@1835,3121.53 ccw(c1835,3156.6) 1859.8,3131.8 ccw(c1884.6,3107) J11.3@1849.53,3107 ; J11.3@1835,3131.53 ccw(c1835,3190.74) 1876.87,3148.87 ccw(c1918.74,3107) J11.3@1859.53,3107 ; U3.27@2193,3230 ccw(c2132.64,3230) 2175.32,3272.68 ccw(c2218,3315.36) U3.27@2218,3255 ; U3.27@2203,3230 ccw(c2166.79,3230) 2192.39,3255.61 ccw(c2218,3281.21) U3.27@2218,3245
LINK4: D9.2 J11.4 U3.40 | length 1109.9
  Top Layer w10: 1785,3263.51 cw(c1867.02,3263.51) D9.2@1809.02,3321.51 ; 1785,3287.66 cw(c1842.88,3287.66) D9.2@1801.95,3328.58 ; 1785,3311.8 cw(c1818.74,3311.8) D9.2@1794.88,3335.65 ; D9.2@1802,3330.5 1785,3313.5 1785,3078 1807,3056 1884,3056 J11.4@1935,3107 ; J11.4@1910.47,3107 cw(c1851.26,3107) 1893.13,3065.13 cw(c1935,3023.26) J11.4@1935,3082.47 ; J11.4@1920.47,3107 cw(c1885.4,3107) 1910.2,3082.2 cw(c1935,3057.4) J11.4@1935,3092.47
  Bottom Layer w10: J11.4@1935,3107 2012,3184 2072,3184 U3.40@2118,3230 ; U3.40@2093,3230 cw(c2032.64,3230) 2075.32,3187.32 cw(c2118,3144.64) U3.40@2118,3205 ; U3.40@2103,3230 cw(c2066.79,3230) 2092.39,3204.39 cw(c2118,3178.79) U3.40@2118,3215
NetC4_1: C4.1 J1.4 L2.1 pad.0 R1.2 R2.2 | length 2299.1
  Top Layer w10: L2.1@3463.5,3090.31 cw(c3463.5,3054.86) 3488.56,3079.93 ; L2.1@3463.5,3105 3492,3076.5 3492,3042 3526,3008 R1.2@3530.5,3008 R2.2@3530.5,2951 3539.12,2951 3599.12,2891 pad.0@3626,2891 ; C4.1@3467.96,2964.51 cw(c3489.67,2942.8) 3489.67,2973.5 cw(c3489.67,3004.2) C4.1@3467.96,2982.5 ; L2.1@3476.21,3103.03 ccw(c3502.16,3103.03) 3483.81,3084.68 ; 3479.11,2973.5 cw(c3479.11,2907.79) R2.2@3528.46,2951.18 ; 3497.75,3036.25 ccw(c3530.5,3069.01) R1.2@3530.5,3022.69 ; 3501.21,2973.5 cw(c3501.21,2927.22) R2.2@3535.97,2957.78 ; R1.2@3513.37,3020.63 cw(c3502.71,3009.97) R1.2@3517.79,3009.97 ; R1.2@3514.82,3019.18 ccw(c3530.5,3034.87) R1.2@3530.5,3012.68 ; R2.2@3520.95,2944.57 ccw(c3457,2888.36) C4.1@3457,2973.5 3525,2973.5 ; R2.2@3521.51,2961.96 ccw(c3499.8,2983.67) 3530.5,2983.67 ccw(c3561.2,2983.67) R2.2@3539.5,2961.96 ; R1.2@3521.51,2997.04 cw(c3499.8,2975.33) 3530.5,2975.33 cw(c3561.2,2975.33) R1.2@3539.5,2997.04 ; 3523.32,2973.5 cw(c3523.32,2946.65) R2.2@3543.49,2964.38 ; pad.0@3623.17,2888.17 ccw(c3616.34,2881.34) 3616.34,2891 ccw(c3616.34,2900.66) pad.0@3623.17,2893.83
  Bottom Layer w15: pad.0@3626,2891 3625,2890 3625,2817 3660,2782 3777,2782 ; 3750.5,2782 3777,2782 ; J1.4@4130.63,2603.11 4274.89,2603.11 4319,2559 4319,2418 4296,2395 4108,2395 3857,2646 3857,2725 3800,2782 3777,2782 ; J1.4@4147.25,2586.49 cw(c4187.36,2546.38) 4187.36,2603.11 cw(c4187.36,2659.84) J1.4@4147.25,2619.73
NetC5_2: C5.2 J1.5 | length 535.6
  Top Layer w15: C5.2@4180.5,2971.82 cw(c4180.5,2942.4) 4201.3,2963.2 ; C5.2@4180.5,2984 4285,2879.5 4285,2688 ; C5.2@4190.71,2982.03 ccw(c4210.62,2982.03) C5.2@4196.54,2967.95 ; J1.5@4230.63,2653.11 4250.11,2653.11 4285,2688 ; J1.5@4232.99,2661.28 ccw(c4242.6,2694.48) 4267.04,2670.04 ; J1.5@4237.16,2675.68 ccw(c4250.65,2722.34) 4285,2688
NetC6_2: C6.2 R3.1 R4.1 | length 315.1
  Top Layer w10: C6.2@3465.5,3163 3490.5,3163 ; C6.2@3475.77,3155.51 cw(c3490.5,3144.77) 3490.5,3163 ; C6.2@3475.77,3170.49 ccw(c3490.5,3181.23) 3490.5,3163 ; 3503.44,3150.07 ccw(c3528.5,3175.14) R3.1@3528.5,3139.69 ; 3508.19,3145.32 cw(c3489.84,3126.97) R3.1@3515.79,3126.97 ; R3.1@3519.51,3114.04 cw(c3495.39,3089.92) 3529.5,3089.92 ; R4.1@3520.51,3078.96 ccw(c3498.8,3100.67) 3529.5,3100.67 ccw(c3560.2,3100.67) R4.1@3538.5,3078.96 ; R4.1@3529.5,3068 3529.5,3124 R3.1@3528.5,3125 3490.5,3163 ; 3529.5,3094.75 cw(c3556.79,3094.75) R3.1@3537.5,3114.04
NetC15_1: C15.1 U2.2 Y1.2 | length 897.4
  Top Layer w10: C15.1@2704,2213.5 Y1.2@2817.12,2213.5 ; C15.1@2709.33,2213.5 ccw(c2709.33,2343.28) Y1.2@2801.09,2251.51 ; C15.1@2714.96,2204.51 cw(c2736.67,2182.8) 2736.67,2213.5 cw(c2736.67,2244.2) C15.1@2714.96,2222.5 ; 2733.47,2213.5 ccw(c2733.47,2319.13) Y1.2@2808.16,2244.44 ; 2757.61,2213.5 ccw(c2757.61,2294.99) Y1.2@2815.24,2237.37 ; 2781.76,2213.5 ccw(c2781.76,2270.85) Y1.2@2822.31,2230.3 ; Y1.2@2835,2231.39 2849.39,2231.39 2909.18,2291.18 2947.77,2291.18 2980.2,2258.76 U2.2@2980.2,2178 ; Y1.2@2848.78,2249.85 ccw(c2848.78,2295.89) Y1.2@2881.34,2263.34 ; Y1.2@2848.78,2259.85 ccw(c2848.78,2330.03) 2898.41,2280.41 ; Y1.2@2867.24,2231.39 cw(c2910.36,2231.39) Y1.2@2879.87,2261.87 ; Y1.2@2877.24,2231.39 cw(c2944.5,2231.39) 2896.94,2278.94
NetC17_1: C17.1 U2.3 Y1.1 | length 853.8
  Top Layer w10: C17.1@2703,2410.5 Y1.1@2829.12,2410.5 ; C17.1@2713.96,2401.5 cw(c2735.67,2379.8) 2735.67,2410.5 cw(c2735.67,2441.2) C17.1@2713.96,2419.49 ; 2738.3,2410.5 cw(c2738.3,2321.69) Y1.1@2801.09,2384.49 ; 2762.44,2410.5 cw(c2762.44,2345.84) Y1.1@2808.16,2391.56 ; 2766.7,2410.5 ccw(c2766.7,2459.13) Y1.1@2801.09,2424.74 ; 2786.59,2410.5 cw(c2786.59,2369.98) Y1.1@2815.24,2398.63 ; Y1.1@2835,2404.61 2843.57,2404.61 2940,2308.18 2954.82,2308.18 3005.39,2257.61 U2.3@3005.39,2178 ; Y1.1@2848.78,2376.15 cw(c2848.78,2320.01) 2888.48,2359.71 ; Y1.1@2848.78,2386.15 cw(c2848.78,2354.15) Y1.1@2871.41,2376.78 ; Y1.1@2867.24,2404.61 ccw(c2924.4,2404.61) 2883.98,2364.2 ; Y1.1@2877.24,2404.61 ccw(c2958.54,2404.61) 2901.06,2347.13
NetC32_1: C32.1 C33.1 C35.1 L8.2 U3.39 U3.52 | length 1313.3
  Top Layer w50: U3.52@2118,2030 U3.39@2218,2030 2273,2030 2334,2091 2435.4,2091 2466.4,2122 v1(2514,2122) ccw(c2514,2180.69) C32.1@2560.24,2144.55 ; U3.39@2218,2035 ccw(c2218,2179.85) 2320.43,2077.43 ; 2287.56,2044.56 cw(c2361.06,1971.06) C33.1@2361.06,2075.01 ; C33.1@2373.53,2076.91 cw(c2407.55,2042.9) 2407.55,2091 ; C33.1@2399.94,2091 ccw(c2399.94,2174.77) L8.2@2459.17,2115.54 ; L8.2@2480.62,2122 ccw(c2480.62,2178.38) v1@2520.49,2138.51 ; C35.1@2500,2387 2514,2373 v1(2514,2303) 2520,2297 2520,2285 v1@2521,2284 ; v1@2506.83,2122 ccw(c2506.83,2196.71) C32.1@2559.65,2143.88 ; v1@2511.02,2135.04 ccw(c2515.53,2189.97) C32.1@2554.5,2151 v1@2525.5,2122 ; v1@2517.75,2114.24 ccw(c2495.41,2136.58) v1@2522.16,2153.38
  Bottom Layer w50: v1(2514,2122) v1(2514,2303)
  other v1: 2512,2147 2519,2275
NetD1_1: D1.1 R5.2 | length 323.1
  Top Layer w10: D1.1@2097,3394.5 2167.01,3394.5 R5.2@2185.5,3376 ; D1.1@2107.96,3385.5 cw(c2129.67,3363.8) 2129.67,3394.5 cw(c2129.67,3425.2) D1.1@2107.96,3403.49 ; D1.1@2114.9,3394.5 cw(c2114.9,3307.37) R5.2@2176.51,3368.98 ; 2139.04,3394.5 cw(c2139.04,3331.51) R5.2@2183.58,3376.05 ; 2163.19,3394.5 cw(c2163.19,3355.65) R5.2@2190.65,3383.12 ; R5.2@2172.87,3379.45 ccw(c2155.93,3381.44) 2167.99,3393.51 ccw(c2177.68,3403.2) R5.2@2181.74,3390.11
NetD2_1: D2.1 R6.2 | length 306
  Top Layer w10: D2.1@1995.51,3402.96 ccw(c1978.42,3422) 2004,3422 ; D2.1@2004,3393.5 2004,3422 ; D2.1@2012.49,3402.96 cw(c2029.58,3422) 2004,3422 ; R6.2@2175.51,3427.01 ccw(c2153.8,3405.3) 2153.8,3436 ccw(c2153.8,3466.7) R6.2@2175.51,3444.99 ; R6.2@2184.5,3436 2018,3436 2004,3422
NetD4_1: D4.1 D5.2 R20.1 | length 424.3
  Top Layer w10: R20.1@3862.5,3469 3941.5,3469 D4.1@3948,3462.5 4008.99,3401.5 D5.2@4050,3401.5 ; R20.1@3871.49,3460.01 cw(c3893.2,3438.3) 3893.2,3469 cw(c3893.2,3499.7) R20.1@3871.49,3477.99 ; 3899.63,3469 cw(c3899.63,3416.09) D4.1@3937.04,3453.5 ; 3923.77,3469 cw(c3923.77,3440.24) D4.1@3944.11,3460.58 ; D4.1@3949.97,3449.78 cw(c3949.97,3423.83) 3968.32,3442.18 ; D4.1@3962.69,3462.5 ccw(c3998.14,3462.5) 3973.07,3437.43 ; D5.2@4039.04,3392.51 ccw(c4017.33,3370.8) 4017.33,3401.5 ccw(c4017.33,3432.2) D5.2@4039.04,3410.5
NetD6_1: D6.1 D7.2 R21.1 | length 664.1
  Top Layer w10: R21.1@3859.5,3378.31 cw(c3859.5,3342.86) 3884.56,3367.93 ; R21.1@3859.5,3393 3917.5,3335 4088.5,3335 D7.2@4153,3399.5 4217.99,3464.5 D6.1@4253,3464.5 ; R21.1@3872.21,3391.03 ccw(c3898.16,3391.03) 3879.81,3372.68 ; 4127.93,3374.44 ccw(c4102.86,3399.5) D7.2@4138.31,3399.5 ; 4132.68,3379.19 cw(c4151.03,3360.84) D7.2@4151.03,3386.79 ; D7.2@4154.97,3412.22 ccw(c4154.97,3438.17) 4173.32,3419.82 ; D7.2@4167.69,3399.5 cw(c4203.14,3399.5) 4178.07,3424.57 ; D6.1@4242.04,3455.5 ccw(c4220.33,3433.8) 4220.33,3464.5 ccw(c4220.33,3495.2) D6.1@4242.04,3473.49
NetD8_1: D8.1 R26.2 | length 628.8
  Top Layer w10: D8.1@1902,3393.5 1902,3416 1953.69,3467.69 2298.31,3467.69 2335,3431 2335,3379 ; 2338,3376 R26.2@2374.5,3376 ; R26.2@2365.51,3367.01 ccw(c2343.8,3345.3) 2343.8,3376 ccw(c2343.8,3406.7) R26.2@2365.51,3384.99
NetD9_1: D9.1 R27.2 | length 862.9
  Top Layer w10: D9.1@1796.68,3393.5 cw(c1830.94,3393.5) 1806.72,3417.72 ; D9.1@1796.87,3405.13 ccw(c1793.4,3413) 1802,3413 ; D9.1@1802,3393.5 1802,3413 ; D9.1@1806.68,3393.5 cw(c1865.08,3393.5) 1823.79,3434.79 ; D9.1@1807.13,3405.13 cw(c1810.6,3413) 1802,3413 ; D9.1@1816.68,3393.5 cw(c1899.22,3393.5) 1840.86,3451.86 ; 2336.63,3470.37 ccw(c2374.5,3508.25) R27.2@2374.5,3454.69 ; 2353.7,3453.3 ccw(c2374.5,3474.11) R27.2@2374.5,3444.69 ; R27.2@2374.5,3440 2367,3440 2322.31,3484.69 1873.69,3484.69 1802,3413
NetJ1_1: J1.1 R2.1 U3.17 | length 1274.8
  Top Layer w10: R2.1@3602.49,2942.01 cw(c3624.2,2920.3) 3624.2,2951 cw(c3624.2,2981.7) R2.1@3602.49,2959.99 ; 3611.87,2951 cw(c3611.87,2887.26) U3.17@3665.4,2921.86 ; 3630.24,2951 cw(c3630.24,2899.13) U3.17@3673.8,2927.29 ; 3648.61,2951 cw(c3648.61,2911) U3.17@3682.2,2932.71 ; U3.17@3657,2916.43 ccw(c3593.5,2875.39) R2.1@3593.5,2951 3657,2951 U3.17@3678,2930 3695,2930 3715,2910 3715,2893 3734,2874 3888,2874 3951,2811 3951,2675 4081,2545 4081,2450 4095.89,2435.11 J1.1@4230.63,2435.11
NetJ1_2: J1.2 R1.1 U3.4 | length 1162.8
  Top Layer w10: R1.1@3593.5,3008 3624,3008 ; R1.1@3602.53,2999.05 cw(c3624,2977.78) 3624,3008 ; R1.1@3602.53,3016.95 ccw(c3624,3038.22) 3624,3008 ; U3.4@3752,2930 3732,2910 3732,2900.04 3741.04,2891 3895.04,2891 3968,2818.04 3968,2683.74 4098.74,2553 4170,2553 4183,2540 4183,2468 4174,2459 4146,2459 4130.63,2474.37 J1.2@4130.63,2503.11 J1.2@4130.63,2485.11 ; U3.4@3778,2930 3753,2955 3729,2955 3723.02,2960.98 3710.98,2960.98 3692.96,2979 3653,2979 3624,3008
NetJ1_3: J1.3 R4.2 U3.16 | length 1303.8
  Top Layer w10: R4.2@3592.5,3068 3593.5,3067 3641,3067 U3.16@3678,3030 3702,3030 3720,3012 3720,2990.96 3738.96,2972 3901,2972 3902,2971 3928,2997 3959.96,2997 4041,2915.96 4041,2698 4084,2655 4148,2655 4230.63,2572.37 J1.3@4230.63,2553.11 J1.3@4230.63,2535.11 ; R4.2@3601.49,3057.04 cw(c3625.53,3032.99) 3625.53,3067 ; R4.2@3601.49,3075.02 ccw(c3620.86,3094.39) 3620.86,3067 ; 4172.63,2630.37 cw(c4095.36,2553.11) J1.3@4204.63,2553.11 ; 4189.7,2613.3 cw(c4129.5,2553.11) J1.3@4214.63,2553.11 ; 4206.77,2596.23 cw(c4163.65,2553.11) J1.3@4224.63,2553.11 ; 4219.12,2583.88 ccw(c4230.63,2595.38) J1.3@4230.63,2579.11
NetJ1_6: J1.6 R3.2 U3.3 | length 1286
  Top Layer w10: R3.2@3591.5,3110.31 cw(c3591.5,3039.85) 3641.32,3089.68 ; R3.2@3591.5,3120.31 cw(c3591.5,3073.99) 3624.25,3106.75 ; R3.2@3591.5,3125 3606,3125 3647,3084 3747,3084 3778,3053 U3.3@3778,3030 3759,3030 3737,3008 3737,2998 3746,2989 3895.96,2989 3920.96,3014 3967,3014 4025.38,2955.62 4058,2923 4058,2771 4075,2754 4159,2754 4191,2722 4191,2686 4175,2670 4162,2670 4141,2691 4141,2699 4134.74,2699 J1.6@4130.63,2703.11 ; 3748.59,3082.41 cw(c3710.28,3044.11) U3.3@3763.32,3033.06 ; 3761.67,3069.33 cw(c3731.94,3039.6) U3.3@3773.11,3031.02
NetJ4_2: J4.2 U3.36 | length 826.3
  Top Layer w10: J4.2@1939,1966 2067,2094 2067,2240 2109,2282 2170,2282 U3.36@2218,2330 ; J4.2@1939,1982 ccw(c1939,2020.63) 1966.31,1993.31 ccw(c1993.63,1966) J4.2@1955,1966 ; J4.2@1939,1992 ccw(c1939,2054.77) 1983.38,2010.38 ccw(c2027.77,1966) J4.2@1965,1966 ; U3.36@2193,2330 cw(c2132.64,2330) 2175.32,2287.32 cw(c2218,2244.64) U3.36@2218,2305 ; U3.36@2203,2330 cw(c2166.79,2330) 2192.39,2304.39 cw(c2218,2278.79) U3.36@2218,2315